# EAGLE board lvc (EAGLE 7.6.0)
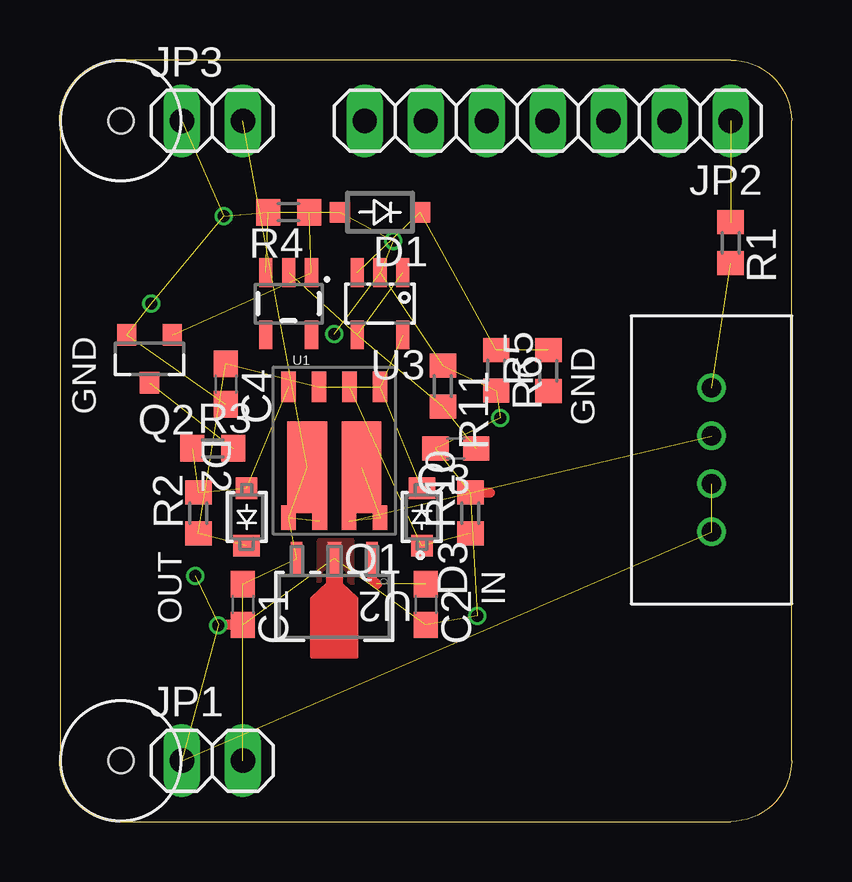
[diagram p0: board, top side]
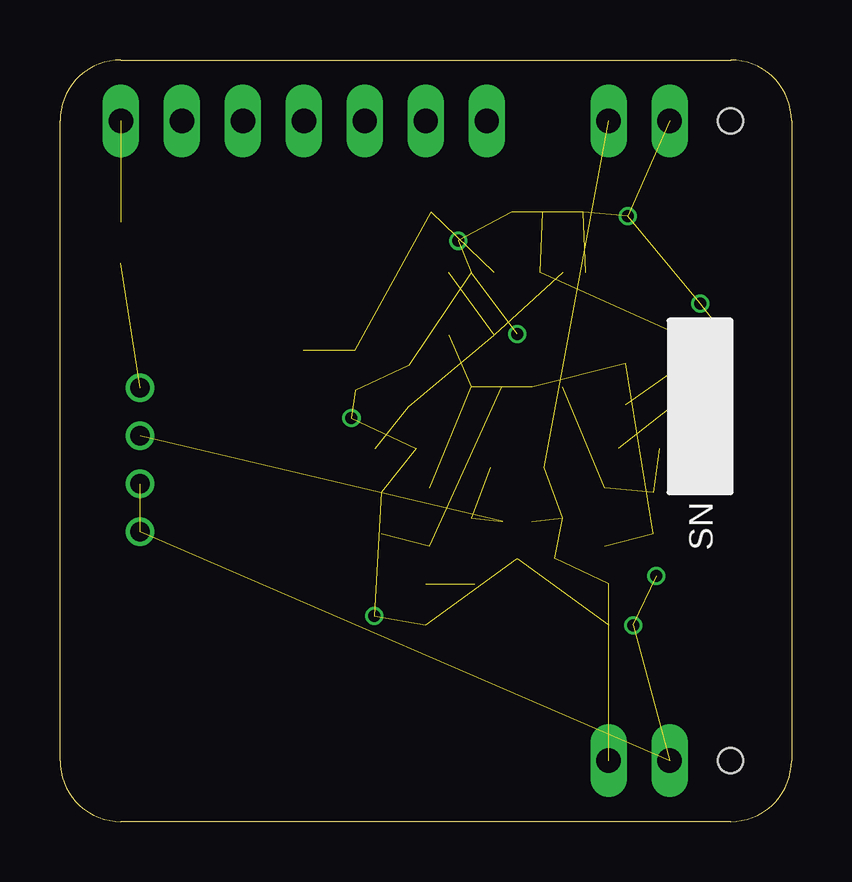
[diagram p1: board, bottom side, seen from below]

Size 30.48 x 31.75 mm. Coordinates in mm from the lower left corner, seen from the top.
Outline: 27.94,31.75 2.54,31.75 arc90 0,29.21 0,2.54 arc90 2.54,0 27.94,0 arc90 30.48,2.54 30.48,29.21 arc90 27.94,31.75
Copper layers (1*16): Top 0.035559375mm / dielectric 1.6mm / Bottom 0.035559375mm
Design rules "oshpark-2layer": minimum track width 6mil, minimum drill 10mil, track to track 6mil, track to pad 6mil, pad to pad 6mil, via to via 6mil, smd to smd 6mil, copper to edge 15mil, drill to drill 6mil, minimum pad ring 5mil, minimum via ring 5mil, stop-mask expansion 2.5mil, vias tented up to drill 0mil, thermal gap 10mil
Holes 1.05 mm at 2.54,29.21 2.54,2.54

## Footprints (pad centres in the part's own frame; a part is rotated, then mirrored left to right if it is on the bottom)
C0603 = smd 1.1 x 1: 1 -0.85,0; 2 0.85,0
SOD123 = smd 0.85 x 0.85: A 1.675,0; C -1.675,0
SMINI2-F5-B = smd 0.9 x 0.9: A -1.2,0 | smd 0.9 x 1.1: C 1.2,0
1X02 = drill 1.016 long: 1 -1.27,0; 2 1.27,0
1X07 = drill 1.016 long: 1 -7.62,0; 2 -5.08,0; 3 -2.54,0; 4 0,0; 5 2.54,0; 6 5.08,0; 7 7.62,0
POWERPAK-SO-8-DUAL = smd 0.61 x 1.27: 1 -1.905,-2.725; 2 -0.635,-2.725; 3 0.635,-2.725; 4 1.905,-2.725 | smd 0.61 x 1.02: 5 1.905,2.74; 8 -1.905,2.74 | smd 1.65 x 3.81: 5L 1.13,0.635; 8L -1.13,0.635 | smd 0.61 x 0.71: 6 0.61,2.895; 7 -0.61,2.895
SOT23 = smd 0.8 x 0.9: 1 -0.95,-1; 2 0.95,-1; 3 0,1
R0603 = smd 1 x 1.1: 1 -0.85,0; 2 0.85,0
SOT23-5 = smd 0.55 x 1.2: 1 -0.95,-1.3; 2 0,-1.3; 3 0.95,-1.3; 4 0.95,1.3; 5 -0.95,1.3
SOT-89 = smd 0.483 x 1.397: 1 -1.57,-1.994; 3 1.57,-1.994 | smd 0.559 x 1.397: 2 0,-1.994
SOT23-DBV = smd 0.55 x 1.2: 1 -0.95,-1.3; 2 0,-1.3; 3 0.95,-1.3; 4 0.95,1.3; 5 -0.95,1.3
4_PIN_MICROCLASP = drill 0.8: P$1 -1,0; P$2 -3,0; P$3 1,0; P$4 3,0

## Placement (x,y rotation side)
C1  0.33uF  [C0603]  7.62,9.05 270 top
C2  0.1uF  [C0603]  15.24,9.05 270 top
C3  47pF  [C0603]  16.49,15.56 180 top
C4  0.1uF  [C0603]  6.91,18.24 270 top
D1  BZT52B8V2  [SOD123]  13.34,25.4 180 top
D2  DZ2J120M0L  [SMINI2-F5-B]  7.78,12.7 270 top
D3  DZ2J120M0L  [SMINI2-F5-B]  15.08,12.7 90 top
JP1  [1X02]  6.35,2.54 0 top
JP2  [1X07]  20.32,29.21 180 top
JP3  [1X02]  6.35,29.21 0 top
Q1  SI7997DP  [POWERPAK-SO-8-DUAL]  11.43,15.4 180 top
Q2  RK7002BMT116  [SOT23]  3.73,19.29 180 top
R1  [R0603]  27.94,24.13 270 top
R2  100k  [R0603]  5.76,12.86 90 top
R3  3k  [R0603]  6.37,15.56 0 top
R4  100k  [R0603]  9.53,25.4 180 top
R5  1M  [R0603]  20.35,18.8 90 top
R6  1M  [R0603]  18.18,18.81 270 top
R10  1M  [R0603]  17.1,12.86 90 top
R11  100k  [R0603]  15.95,18.16 270 top
U1  NCP300LSN33T1G  [SOT23-5]  9.53,21.59 180 top
U2  L78L33ACUTR  [SOT-89]  11.43,8.97 180 top
U3  TLV170IDBVR  [SOT23-DBV]  13.34,21.59 180 top
U$1  MICROCLASP_4  [4_PIN_MICROCLASP]  27.15,15.08 270 top

## Library data of the parts
C1-C4 = rcl; SPICEPREFIX: C
D1 = vishay1
D2 D3 = LR_zener; MANUFACTURER_PART_NUMBER: DZ2J120M0L; VENDOR: Panasonic
JP1-JP3 = pinhead
Q1 = AR_transistor
Q2 = LR_transistor
R1-R6 R10 = resistor
R11 = rcl; SPICEPREFIX: R
U1 = onsemi
U2 = LR_vreg; MANUFACTURER_PART_NUMBER: L78L33ACUTR; VENDOR: STMicroelectronics
U3 = LR_op_amps
U$1 = NR_connectors

## Nets
EN: R5.1
GND: C1.2 C2.2 C3.2 C4.2 D1.A JP1.1 JP3.1 Q2.2 R4.2 R6.2 R10.2 R11.1 U1.3 U2.2 U3.2 U$1.P$3 U$1.P$4
LED: C2.1 U2.1
LOAD: Q2.1 R4.1 U1.1
MISO_6: JP2.2
N$1: R1.2 U$1.P$2
N$5: D2.A Q1.4 R2.2 R3.1
N$6: D3.A Q1.2 R10.1
N$7: Q2.3 R3.2
N$9: JP2.7
RST: JP2.6
SCK_7: JP2.3
SCL_16: JP2.5
SDA_17: JP2.4
STATUS: JP2.1 R1.1
V+: C4.1 D2.C D3.C Q1.1 Q1.3 R2.1 U3.5
V_DIV: D1.C R5.2 R6.1 U3.3
V_DIV_BUF: C3.1 R11.2 U1.2 U3.1 U3.4
VDD: Q1.7 Q1.8 Q1.8L U$1.P$1
VREG: C1.1 JP1.2 JP3.2 Q1.5 Q1.5L Q1.6 U2.3

## Tracks (layer width: path | path; a pad name or v marks a point on that pad's centre or on a via)
GND  (via drill 0.5)  (23 unrouted)
  Top 0.406: C1.2 6.61,8.2 v6.59,8.18 | R10.2 17.92,13.71
  other vias: 17.38,8.57 13.89,24.21 6.83,25.24 3.81,21.59 11.43,20.32 5.64,10.24 18.34,16.83
  pour Top (rank 3, no thermals): 12.14,11.7 12.14,9.92 12.7,9.37 12.78,6.19 10.11,6.27 10.16,9.21 10.83,9.89 10.83,11.7
LED  (1 unrouted)
  Top 0.406: 13.2,9.9 13.02,10.08 13.02,10.95 U2.1
LOAD  (2 unrouted)
N$1  (1 unrouted)
N$5  (3 unrouted)
N$6  (2 unrouted)
N$7  (1 unrouted)
STATUS  (1 unrouted)
V+  (6 unrouted)
V_DIV  (3 unrouted)
V_DIV_BUF  (4 unrouted)
VDD  (3 unrouted)
VREG  (6 unrouted)

## Text on the board
tPlace: GND | GND | IN | OUT
bPlace: SN
Document: 2oz Copper / FR-4 or 408 / 1.0±0.1 Via plate thickness